# EAGLE board NodeNadelAdapterLayer2 (EAGLE 6.1)
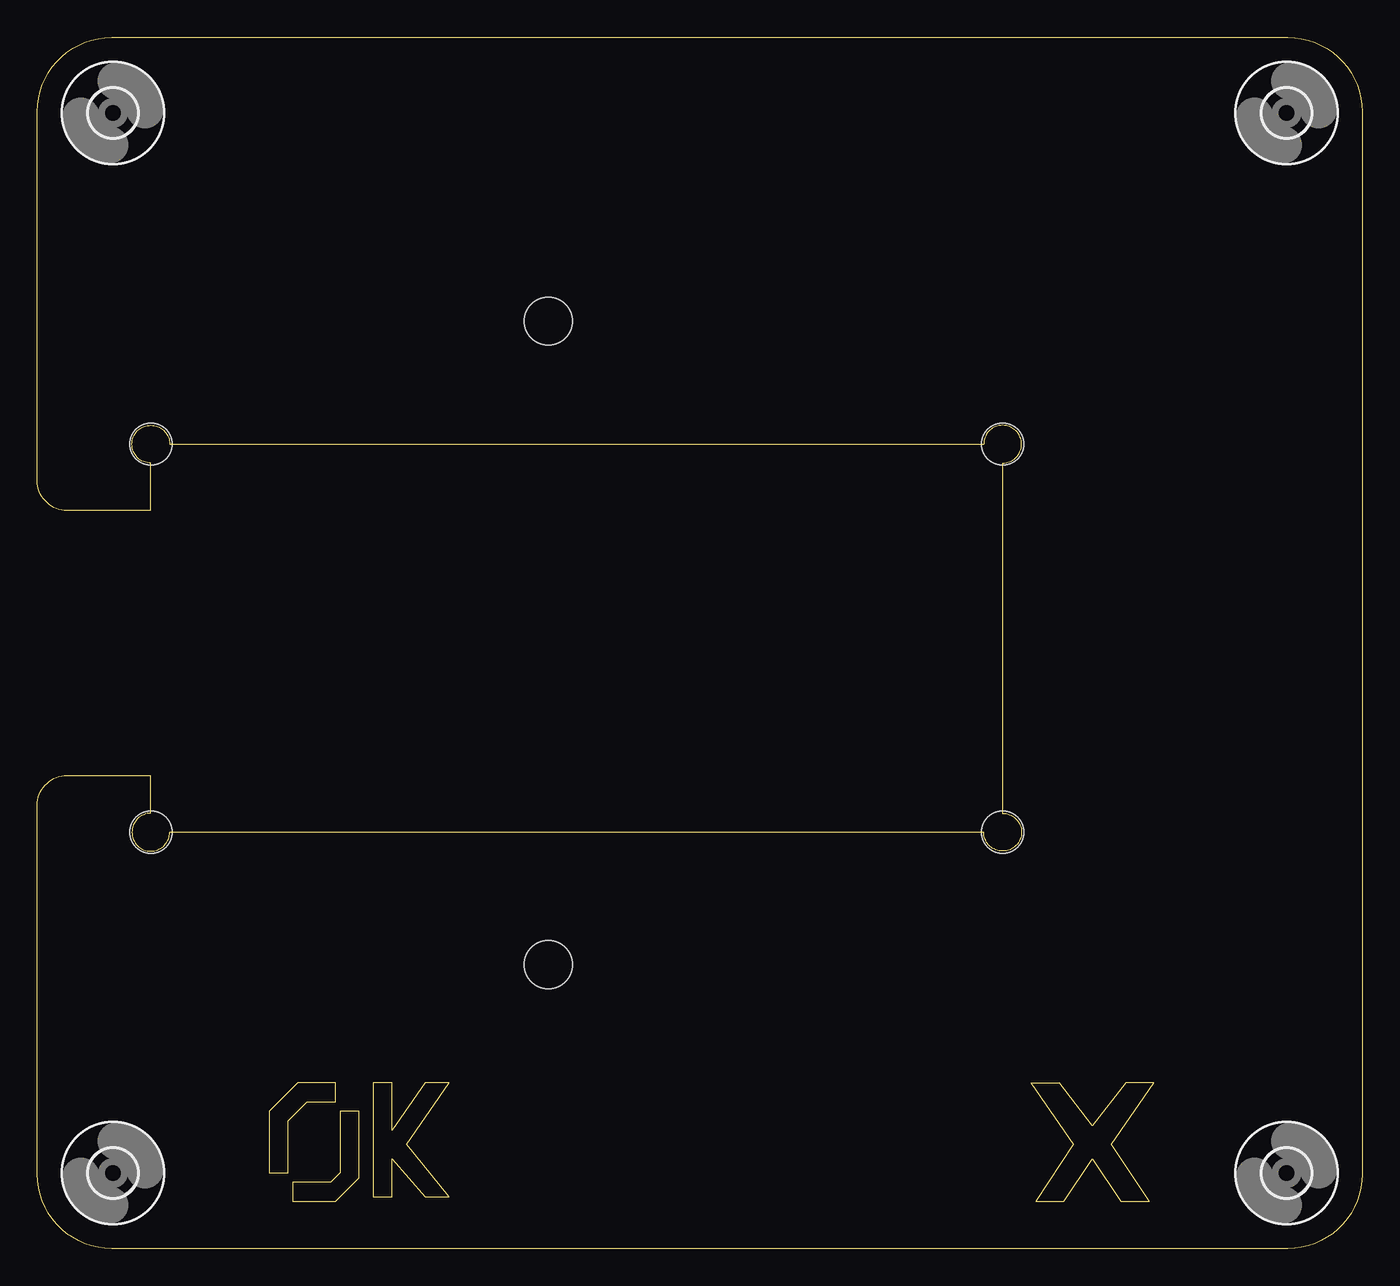
[diagram p0: board, top side]
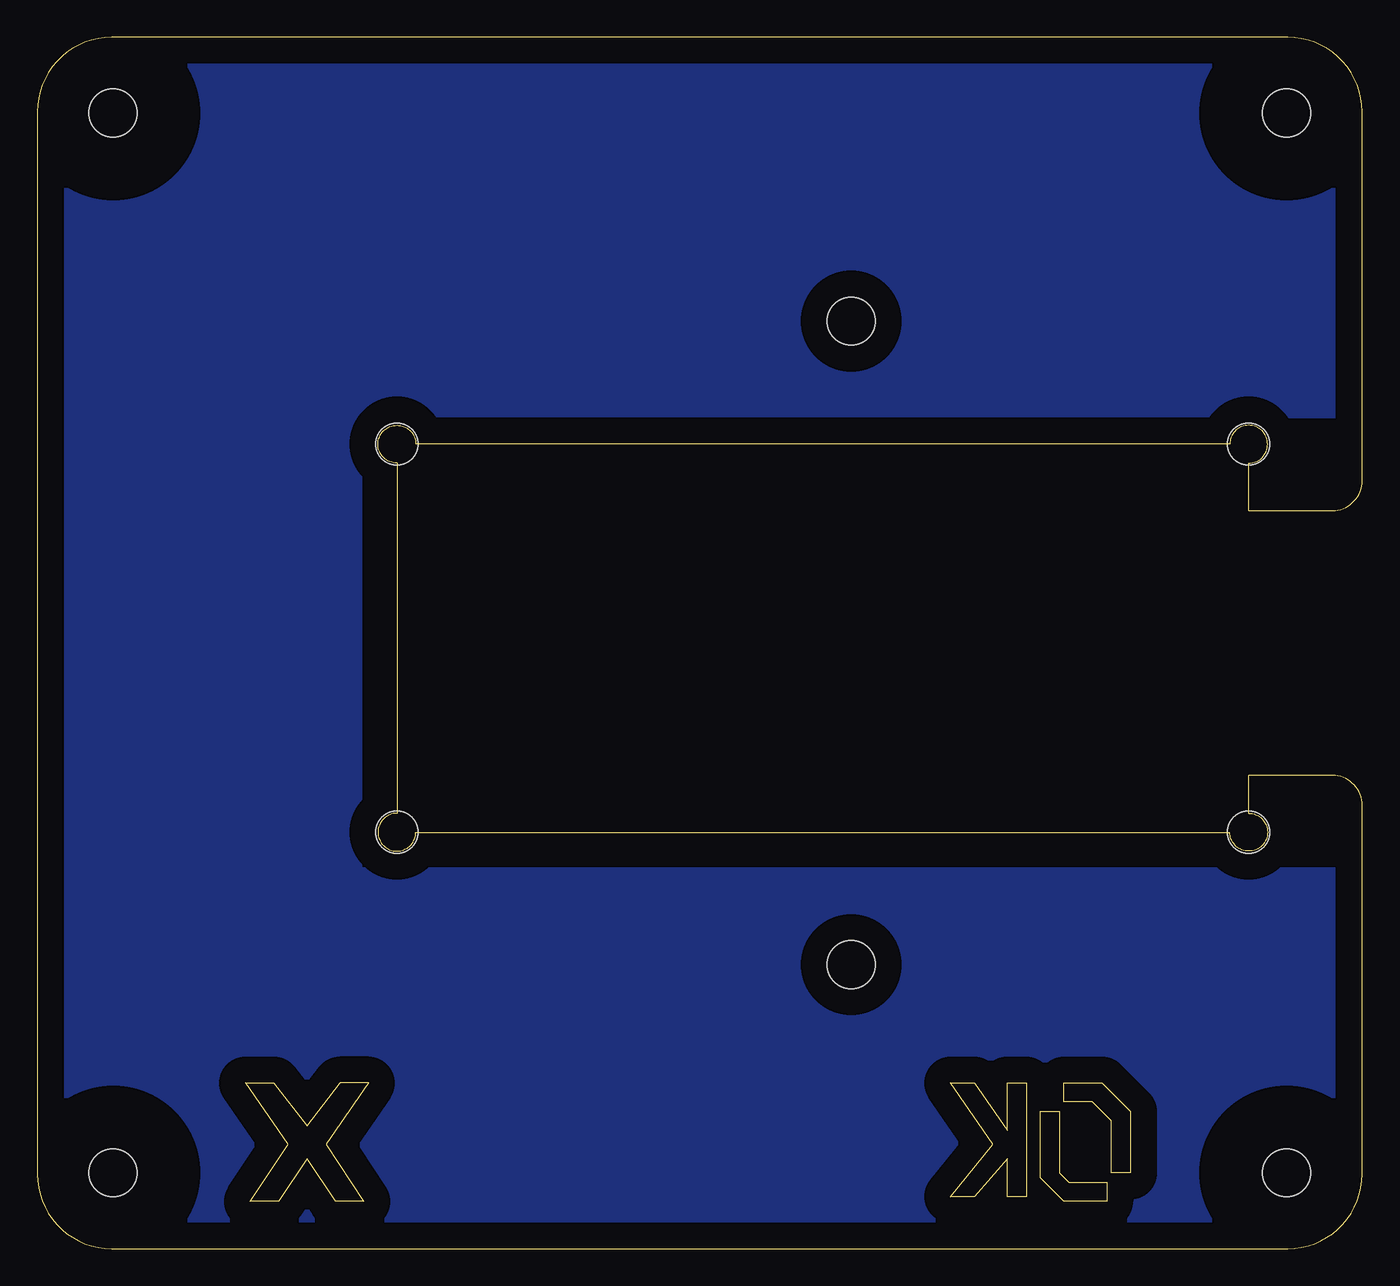
[diagram p1: board, bottom side, seen from below]

Size 88.9 x 81.28 mm. Coordinates in mm from the lower left corner, seen from the top.
Outline: 7.62,49.53 2,49.53 arc-90 0,51.53 0,76.28 arc-90 5,81.28 83.9,81.28 arc-90 88.9,76.28 88.9,5 arc-90 83.9,0 5,0 arc-90 0,5 0,29.75 arc-90 2,31.75 7.62,31.75 7.62,29.21 arc180 7.62,26.67 arc90 8.89,27.94 63.5,27.94 arc90 64.77,26.67 arc180 64.77,29.21 64.77,52.7 arc180 64.77,55.24 arc90 63.5,53.98 8.89,53.98 arc90 7.62,55.24 arc180 7.62,52.7 7.62,49.53
Outline: 15.56,5.08 16.83,5.08 16.83,8.57 18.1,9.84 20,9.84 20,11.11 17.46,11.11 15.56,9.21 15.56,5.08
Outline: 17.14,4.45 17.14,3.17 20,3.17 21.59,4.76 21.59,9.21 20.32,9.21 20.32,5.08 19.68,4.45 17.14,4.45
Outline: 22.54,11.11 22.54,3.49 23.81,3.49 23.81,6.03 26.04,3.49 27.62,3.49 24.77,6.99 27.62,11.11 26.04,11.11 23.81,7.94 23.81,11.11 22.54,11.11
Outline: 74.93,11.11 73.03,11.11 70.8,8.26 68.58,11.11 66.67,11.11 69.53,6.99 66.99,3.17 68.9,3.17 70.8,6.03 72.71,3.17 74.61,3.17 72.07,6.99 74.93,11.11
Copper layers (1*16): Top 0.035mm / dielectric 1.5mm / Bottom 0.035mm
Design rules: minimum track width 10mil, minimum drill 24mil, track to track 8mil, track to pad 8mil, pad to pad 8mil, via to via 8mil, smd to smd 8mil, copper to edge 40mil, drill to drill 8mil, minimum pad ring 10mil, minimum via ring 8mil, stop-mask expansion 4mil, vias tented up to drill 0mil, thermal gap 10mil
Holes 3.2 mm at 34.29,62.23 34.29,19.05
Holes 2.8 mm at 64.77,53.98 64.77,27.94 7.62,27.94 7.62,53.98

## Footprints (pad centres in the part's own frame; a part is rotated, then mirrored left to right if it is on the bottom)
3,2 = hole 3.2: 0,0

## Placement (x,y rotation side)
H1  MOUNT-HOLE3.2  [3,2]  5.08,5.08 0 top
H2  MOUNT-HOLE3.2  [3,2]  5.08,76.2 0 top
H3  MOUNT-HOLE3.2  [3,2]  83.82,5.08 0 top
H4  MOUNT-HOLE3.2  [3,2]  83.82,76.2 0 top

## Library data of the parts
H1-H4 = holes

## Tracks (layer width: path | path; a pad name or v marks a point on that pad's centre or on a via)
S$6
  pour Bottom (isolate 1.778): 0,25.4 0,5 arc90 5,0 83.9,0 arc90 88.9,5 88.9,76.28 arc90 83.9,81.28 5,81.28 arc90 0,76.28 0,55.88 67.31,55.88 67.31,25.4